# Altium PCB rtl_001_expansion_v1.0.PcbDoc
Units mil, origin at the board's own origin, x right, y up, seen from the top; angles counter-clockwise.
Board outline 1735.38 x 2875.26 mil, 2 copper layers (Top Layer, Bottom Layer); 30 components, 28 nets, 100 pads, 57 vias.
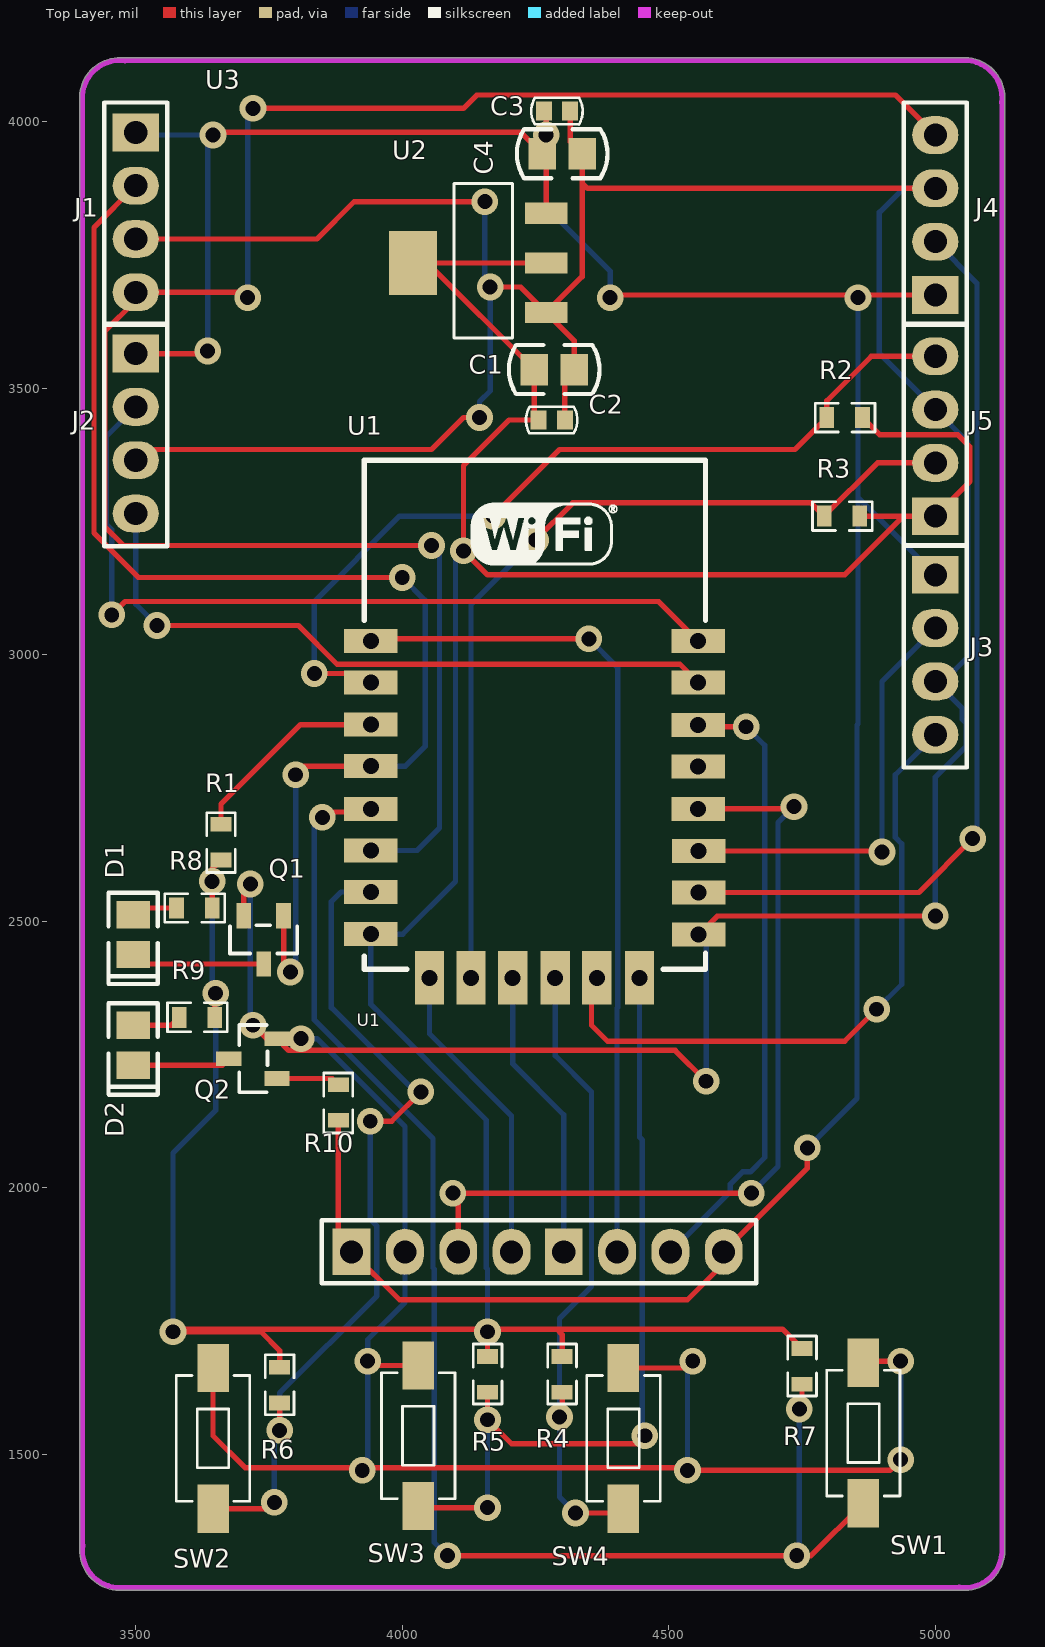
[diagram p0: Top Layer view]
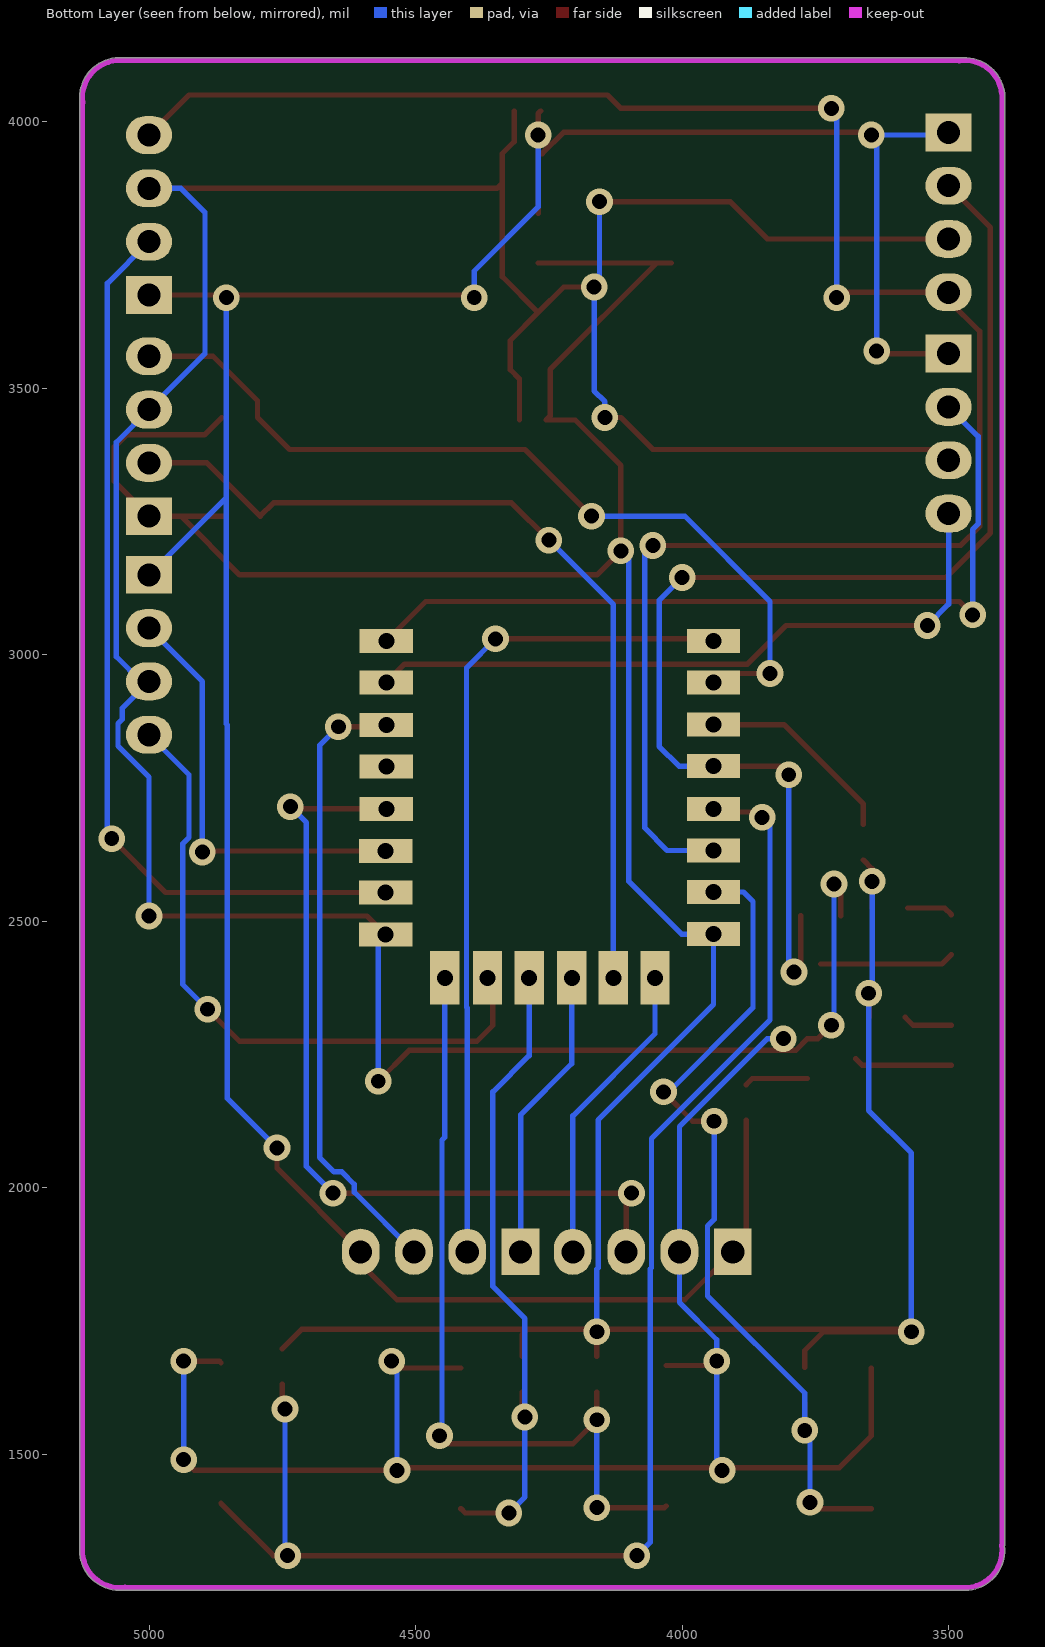
[diagram p1: Bottom Layer view, seen from below]

## Layer stack, top to bottom
Top Solder: solder mask 0.4, Solder Resist, Dk 3.5
Top Layer: signal copper 1.4
Dielectric 1: dielectric 12.6, FR-4, Dk 4.8
Bottom Layer: signal copper 1.4
Bottom Solder: solder mask 0.4, Solder Resist, Dk 3.5

## Board outline
3395.26,1328.28 ccw(c3470,1320) 3475,1244.97 ccw(c3474.67,1249.98) 3475.15,1244.98 5049.82,1244.98 ccw(c5055,1320) 5130.19,1320 ccw(c5055,1320) 5130.03,1325 ccw(c5125.02,1324.67) 5130.02,1325.15 5130.02,4039.82 ccw(c5055,4045) 5130.19,4045 ccw(c5055,4045) 5050,4120.03 ccw(c5050.33,4115.02) 5049.85,4120.02 3480,4120.02 ccw(c3480,4115) 3478.33,4119.73 ccw(c3470,4045) 3394.97,4040 ccw(c3399.98,4040.33) 3394.99,4039.85 3394.99,1329.92 ccw(c3400,1329.92)

## Design rules (kind name [scope] priority, off if disabled: settings)
Clearance [All] p1: gap=7 ignorepadtopadclearanceinfootprint=FALSE
PolygonConnect [All] p1: connectstyle=Relief reliefconductorwidth=10 reliefentries=4 polygonreliefangle="90 Angle" airgapwidth=10
RoutingVias [All] p1: holewidth=28 width=50 viastyle="Through Hole" minholewidth=28 minwidth=50 maxholewidth=28 maxwidth=50
SolderMaskExpansion [All] p1: expansion=4
Width [All] p1: maxlimit=10 minlimit=10 preferedwidth=10
30 further rules are at their usual default settings.

## Components (designator, comment, footprint, x,y, rotation, side; value= is the part's Value field where it differs from the comment)
C1 "10UF" "CAP_SMD[ 0805]" 4285,3535 r90 top
C2 "100nF" "CAP_SMD[ 0603]" 4280,3440 r90 top
C3 "100nF" "CAP_SMD[ 0603]" 4290,4019.5 r90 top
C4 "10UF" "CAP_SMD[ 0805]" 4300,3940 r90 top
D1 "LED_SMD[0805]" LED_SMD[0805] 3495,2475 r90 top
D2 "LED_SMD[0805]" LED_SMD[0805] 3495,2267.6 r90 top
J1 "Header 4" "HEADER 4X1" 3500,3980 r270 top
J2 "Header 4" "HEADER 4X1" 3500,3565 r270 top
J3 "Header 4" "HEADER 4X1" 5000,3150 r270 top
J4 "Header 4" "HEADER 4X1" 5000,3675 r90 top
J5 "Header 4" "HEADER 4X1" 5000,3260 r90 top
Q1 "BC817" SOT-23 3740,2420 r180 top
Q2 "BC817" SOT-23 3674.45,2242.4 r90 top
R1 "10K" "res_smd [0603]" 3660,2648.46 r270 top
R2 "10K" "res_smd [0603]" 4830,3445 r0 top
R3 "10K" "res_smd [0603]" 4825,3260 r0 top
R4 "10K" "res_smd [0603]" 4300,1650 r90 top
R5 "10K" "res_smd [0603]" 4160,1650 r90 top
R6 "10K" "res_smd [0603]" 3770,1630 r90 top
R7 "10K" "res_smd [0603]" 4750,1665 r90 top
R8 "330R" "res_smd [0603]" 3610,2525 r0 top
R9 "330R" "res_smd [0603]" 3615,2320 r0 top
R10 "330R" "res_smd [0603]" 3880,2160 r270 top
SW1 "" 434111043826 4865,1540 r90 top
SW2 "" 434111043826 3645,1530 r90 top
SW3 "" 434111043826 4030,1535 r90 top
SW4 "" 434111043826 4415,1530 r90 top
U1 "RTL_001" RTL-001 4594,2384 r0 top
U2 "AMS1117-3.3" SOT-223 4145,3735 r0 top
U3 "LCD_1_8_module" LCD_1_8_inch_module 3570,1754 r0 top locked

## Footprints (in the part's own frame and the unit in brackets; to place one, negate y for a bottom-side part, rotate by r counter-clockwise, add the part's x,y. Pads: shape width x height; smd on the part's side, far side on the other; paste and mask are expansions set on the pad)
434111043826 [mm] "6.0*3.5mm vertical type, SMD, height 4.3mm, white actuator, 260gf, T&R"
  rect 2.3x1.5 smd: 1(-3.35,0) 2(3.35,0)
  silkscreen extent -3,-1.75 3,1.75, body extent -4,-1.75 4,1.75, height 4.3
"CAP_SMD[ 0603]" [mil]
  rect 35x30 smd: 1(0.5,-25) 2(0.5,24.5)
  silkscreen extent -25,-48 25,48, body extent -15,-33 16,30, height 12
"CAP_SMD[ 0805]" [mm]
  rect 1.5x1.3 smd: 1(0,-0.95) 2(0,0.95)
  silkscreen extent -1.17,-2.16 1.17,2.16
"HEADER 4X1" [mm]
  rect 1.8x2.2 hole 1.1: 1(0,0)
  oval 1.8x2.2 hole 1.1: 2(2.54,0) 3(5.08,0) 4(7.62,0)
  silkscreen extent -1.43,-1.5 9.18,1.5, body extent -1.19,-1.22 8.97,1.32, height 8.38
LCD_1_8_inch_module [mm] "lcd 1.8 inch sst7735"
  rect 1.8x2.2 hole 1.1: 1(8.509,3.2) 5(18.618,3.2)
  oval 1.8x2.2 hole 1.1: 2(11.049,3.2) 3(13.589,3.2) 4(16.129,3.2) 6(21.158,3.2) 7(23.698,3.2) 8(26.238,3.2)
  silkscreen extent 7.08,1.7 27.79,4.7, body extent 7.32,1.98 27.58,4.52, height 2.54
LED_SMD[0805] [mm]
  rect 1.3x1.6 smd: 1(0.95,0) 2(-0.95,0)
  silkscreen extent -2.36,-1.18 2,1.18
"res_smd [0603]" [mm]
  rect 0.7x1 smd: 1(-0.85,0) 2(0.85,0)
  silkscreen extent -1.41,-0.69 1.45,0.69, body extent -0.8,-0.43 0.8,0.43, height 0.48
RTL-001 [mil] "wifi module"
  rect 100x45 hole 30: 1(-653,642) 2(-653,564) 3(-653,485) 4(-653,407) 5(-653,327) 6(-653,249) 7(-653,171) 8(-653,92) 15(-38,91) 16(-38,170) 17(-38,248) 18(-39,327) 19(-39,406) 20(-39,484) 21(-39,564) 22(-39,642)
  rect 55x100 hole 30: 9(-543,10) 10(-465,10) 11(-387,10) 12(-307,10) 13(-229,10) 14(-149,10)
  silkscreen extent -665,26 -25,981, body extent -658,31 -28,976
SOT-23 [mm]
  rect 0.7x1.2 smd: 1(-0.95,-2.3) 2(0.95,-2.3) 3(0,0)
  silkscreen extent -1.6,-1.85 1.6,-0.5, body extent -1.46,-2.41 1.46,-0.07, height 1
SOT-223 [mil]
  rect 80x40 smd: 1(125,-93) 2(125,0) 3(125,93)
  rect 90x120 smd: 4(-125,0)
  silkscreen extent -48,-141 62,149, body extent -131,-128 143,128, height 63

## Part data
C1 C4: library part "CAP_smd [0805]", "capacitor", Package=[0805], Package Type=smd, part number=Capacitor, brief description="ceramic capacitor", Device Type=CAPACITOR
C2 C3: library part "CAP_smd [0603]", "capacitor", Package=[0603], Package Type=smd, part number=Capacitor, brief description="ceramic capacitor", Device Type=CAPACITOR
D1 D2: "Typical (?COLOR?) LED", Package=[0805], Package Type=smd, brief description="Typical (?COLOR?) LED", Device Type=MISCELLANEOUS, ???????="?? ?????????", ????=900-620
J1 J2 J3 J4 J5: "Header, 4-Pin", Package="Header, 4-Pin(2.54mm)", Package Type="through hole", brief description="Header, 4-Pin", Device Type=CONNECTOR
Q1 Q2: "SMD;TRANSISTOR;BC817;SOT-23;NPN;(General-purpose)", ?????=SMD;TRANSISTOR;BC817;SOT-23;NPN;(General-purpose), ???????="???? ?????????-?? ?????????-???? ?????????", ????="420-1.500  1.000??-1", ????=SOT-23
R1 R2 R3 R4 R5 R6 R7 R8 R9 R10: library part "Res_smd [0603]", "Resistor", Package=[0603], Package Type=smd, Device Type=RESISTOR, part number=Resistor, Revision="July-2002: Re-released for DXP Platform."
SW1 SW2 SW3 SW4: library part "WE-Tact Switches WS-TASV 434111043826", "WS-TASV SMD Tact Switch 6.0X3.5 mm", manufacturer="Würth Elektronik eiSos GmbH & Co.KG", partNo=434111043826, ComponentLink1 Description=Manufacturer, ComponentLink1URL=http://www.we-online.com, ComponentLink2 Description=Datasheet, ComponentLink2URL=http://katalog.we-online.de/em/datasheet/434111043826.pdf, Creat by="Karrer Zheng", Creat Date="5 March February 2014", NoPins=02
U2: "Adjustable/Fixed Low Dropout Linear Regulator", ?????="Adjustable/Fixed Low Dropout Linear Regulator", ???????="???? ?????????", ????=1.570, ????=SOT-223

## Via types
v1: diameter 50, hole 28, Top Layer to Bottom Layer, 57 vias

## Nets (pads, with @x,y where several pads share a name; then routed paths per layer and width w, separated by ;. In a path a pad name is that pad's centre, name@x,y a point inside that pad or via, vN(x,y) a via of type N, cw(c..) or ccw(c..) an arc to the next point about the centre after c; other vN are vias at no path point)
D1: R4.1 SW4.1 U1.12 | length 1211.4
  Top Layer w10: v1(4295,1570) 4300,1575 R4.1 ; v1(4325,1390) 4406.89,1390 SW4.1
  Bottom Layer w10: U1.12 4287,2248 4355,2180 4355,1815 4295,1755 v1(4295,1570) 4295,1420 v1(4325,1390)
D2: R5.1 SW3.1 U1.14 | length 1530.8
  Top Layer w10: SW3.1 4033.11,1400 v1(4160,1400) ; R5.1 v1(4160,1565) 4205,1520 4440,1520 v1(4455,1535)
  Bottom Layer w10: v1(4160,1400) v1(4160,1565) ; U1.14 4445,2095 4450.43,2089.57 4450.43,1539.57 v1(4455,1535)
D3: U1.9 U3.4 | length 577.8
  Bottom Layer w10: U1.9 4051,2289 4205,2135 U3.4
D5: U1.11 U3.5 | length 553.8
  Bottom Layer w10: U1.11 4207,2233 4303,2137 U3.5
D15: R7.1 SW1.1 U1.5 | length 2738.7
  Top Layer w10: v1(3850,2695) 3860,2705 3935,2705 U1.5 ; v1(4085,1310) v1(4740,1310) 4766.89,1310 SW1.1 ; v1(4745,1585) 4750,1590 R7.1
  Bottom Layer w10: v1(3850,2695) 3835,2680 3835,2315 4057.57,2092.43 4057.57,1850.05 4060,1847.61 4060,1335 v1(4085,1310) ; v1(4740,1310) 4745,1315 v1(4745,1585)
D16: R6.1 SW2.1 U1.7 | length 1603
  Top Layer w10: SW2.1 3748.11,1398.11 v1(3760,1410) ; v1(3770,1545) R6.1 ; v1(3940,2125) 3980,2125 v1(4035,2180)
  Bottom Layer w10: v1(3760,1410) 3760,1535 v1(3770,1545) 3770,1615 3952.43,1797.43 3952.43,1928.28 3940,1940.71 v1(3940,2125) ; U1.7 3885,2555 3867,2537 3867,2338 4025,2180 v1(4035,2180)
ENABLE: R1.1 U1.3 | length 380.8
  Top Layer w10: R1.1 3660,2720 3809,2869 U1.3
GND: C1.1 C2.1 C3.1 C4.1 J1.3 J2.3 J3.3 J4.3 J5.3 Q1.2 Q2.2 SW1.2 SW2.2 SW3.2 SW4.2 U1.15 U2.1 U3.2 | length 9872
  Top Layer w10: J2.3 3520,3385 4055,3385 4115,3445 v1(4145,3445) ; J1.3 3840,3780 3910,3850 v1(4155,3850) ; SW2.2 3645,1535 3705,1475 4530,1475 v1(4535,1470) 4915,1470 v1(4935,1490) ; Q1.2 3702.6,2557.6 v1(3715,2570) ; v1(3720,2305) 3745.2,2279.8 Q2.2 3786.8,2258 4512,2258 v1(4570,2200) ; v1(3935,1675) 3943.11,1666.89 SW3.2 ; v1(4165,3690) 4222,3690 U2.1 ; C2.1 4305,3517.6 C1.1 4322.4,3589.6 U2.1 ; C3.1 4315,3962.4 C4.1 4337.4,3885 ; SW4.2 4531.89,1661.89 v1(4545,1675) ; U1.15 4591,2510 v1(5000,2510) ; SW1.2 4868.11,1675 v1(4935,1675) ; J4.3 4347.4,3875 4337.4,3885 ; U2.1 4337.4,3709.4 4337.4,3885
  Bottom Layer w10: v1(3715,2570) 3715,2310 v1(3720,2305) ; v1(3810,2280) 3840,2280 4005,2115 U3.2 4005,1785 3935,1715 v1(3935,1675) 3935,1480 v1(3925,1470) ; v1(4145,3445) 4145,3475 4165,3495 v1(4165,3690) 4160,3690 4155,3695 v1(4155,3850) ; v1(4535,1470) 4535,1665 v1(4545,1675) ; U1.15 4570,2461 v1(4570,2200) ; v1(4935,1490) v1(4935,1675) ; v1(5000,2510) 5000,2770.8 5058.31,2829.11 5058.31,2870.89 5050,2879.2 5050,2900 J3.3 5015,2950 5061.31,2996.31 5061.31,3398.69 J5.3 4895,3565 4895,3830 4940,3875 J4.3
I2C1_SCL: J5.4 R2.1 U1.2 | length 1622.1
  Top Layer w10: v1(3835,2965) 3924,2965 U1.2 ; v1(4170,3260) 4295,3385 4736.54,3385 R2.1 4796.54,3476.54 4880,3560 J5.4
  Bottom Layer w10: v1(3835,2965) 3835,3100 3995,3260 v1(4170,3260)
I2C1_SDA: J5.2 R3.1 U1.10 | length 1701.9
  Top Layer w10: v1(4250,3215) 4320,3285 4766.54,3285 R3.1 4891.54,3360 J5.2
  Bottom Layer w10: U1.10 4129,3094 v1(4250,3215)
LOG_RX: J2.4 U1.21 | length 1286.3
  Top Layer w10: v1(3540,3055) 3805,3055 3878,2982 3885.53,2982 3886.03,2982.5 4520.5,2982.5 U1.21
  Bottom Layer w10: J2.4 3500,3095 v1(3540,3055)
LOG_TX: J2.2 U1.22 | length 1558.2
  Top Layer w10: v1(3455,3075) 3480,3100 4481,3100 U1.22
  Bottom Layer w10: v1(3455,3075) 3455,3235.05 3444.69,3245.35 3444.69,3409.69 J2.2
NetD1_1: D1.1 R8.1 | length 86.8
  Top Layer w10: D1.1 3507.6,2525 R8.1
NetD1_2: D1.2 Q1.3 | length 252.3
  Top Layer w10: D1.2 3512.6,2420 Q1.3
NetD2_1: D2.1 R9.1 | length 92.7
  Top Layer w10: D2.1 3566.54,2305 R9.1
NetD2_2: D2.2 Q2.3 | length 184.5
  Top Layer w10: D2.2 3662.24,2230.2 Q2.3
NetQ2_1: Q2.1 R10.1 | length 119.8
  Top Layer w10: Q2.1 3868.46,2205 R10.1
PWM0: U1.18 U3.3 | length 1613.9
  Top Layer w10: U3.3 4105,1980 v1(4095,1990) v1(4655,1990) ; U1.18 4731,2711 v1(4735,2715)
  Bottom Layer w10: v1(4655,1990) 4705,2040 4705,2685 v1(4735,2715)
SPI0_CLK: U1.20 U3.7 | length 1172.6
  Top Layer w10: U1.20 4558,2865 v1(4645,2865)
  Bottom Layer w10: U3.7 4615,1992 4615,2006.57 4638.43,2030 4653,2030 4680,2057 4680,2830 v1(4645,2865)
SPI0_MISO: U1.19
SPI0_MOSI: U1.1 U3.6 | length 1583.9
  Top Layer w10: U1.1 3945,3030 v1(4350,3030)
  Bottom Layer w10: v1(4350,3030) 4404.5,2975.5 4404.5,2339.03 4403,2337.53 U3.6
SWCLK: J1.2 Q1.1 U1.4 | length 2381.6
  Top Layer w10: J1.2 3421.69,3801.69 3421.69,3228.31 3505,3145 v1(4000,3145) ; Q1.1 3777.4,2417.6 v1(3790,2405) ; v1(3800,2775) 3816,2791 U1.4
  Bottom Layer w10: v1(3790,2405) 3800,2415 v1(3800,2775) ; U1.4 4006,2791 4043,2828 4043,3102 v1(4000,3145)
SWDIO: J1.4 J4.4 U1.6 | length 3668.8
  Top Layer w10: v1(3710,3670) 3700,3680 J1.4 3500,3664.95 3441.69,3606.65 3441.69,3240.8 3477.5,3205 v1(4055,3205) ; v1(3720,4025) 4115,4025 4140,4050 4925,4050 J4.4
  Bottom Layer w10: v1(3710,3670) 3710,4015 v1(3720,4025) ; U1.6 4028,2633 4070,2675 4070,3190 v1(4055,3205)
U0_TX: J4.2 U1.16 | length 1711.7
  Top Layer w10: U1.16 4969,2554 v1(5070,2655)
  Bottom Layer w10: J4.2 5078.31,3696.69 5078.31,2663.31 v1(5070,2655)
U2_RX: J3.4 U1.13 | length 1235.9
  Top Layer w10: U1.13 4355,2384 4355,2305 4385,2275 4830,2275 v1(4890,2335)
  Bottom Layer w10: v1(4890,2335) 4937,2382 4937,2645.33 4925,2657.33 4925,2775 J3.4
U2_TX: J3.2 U1.17 | length 806.2
  Top Layer w10: U1.17 4898,2632 v1(4900,2630)
  Bottom Layer w10: v1(4900,2630) 4900,2950 J3.2
VCC: C3.2 C4.2 J1.1 J2.1 J3.1 J4.1 R10.2 U2.3 U3.1 U3.8 | length 5629.9
  Top Layer w10: J2.1 3630,3565 v1(3635,3570) ; v1@3645,3980 4222.6,3980 C4.2 ; R10.2 3880,1905 U3.1 3995,1790 4535,1790 4590,1845 4590,1867 U3.8 4760,2037 v1(4760,2075) ; C3.2 4270,4015.5 v1(4270,3975) U2.3 ; v1(4390,3670) 4395,3675 J4.1
  Bottom Layer w10: J1.1 3505,3975 v1(3645,3975) 3635,3965 v1(3635,3570) ; v1(4270,3975) 4270,3840 4390,3720 v1(4390,3670) ; v1(4760,2075) 4853,2168 4853,2868 4855,2870 4855,3295 ; v1(4855,3670) 4855,3295 ; J3.1 4855,3295
VCC_3V3: C1.2 C2.2 J5.1 R1.2 R2.2 R3.2 R4.2 R5.2 R6.2 R7.2 R8.2 R9.2 U1.8 U2.2 U2.4 | length 6615.2
  Top Layer w10: R8.2 v1(3643.46,2575) 3643.46,2598.46 R1.2 ; R9.2 3648.46,2363.46 v1(3650,2365) ; R6.2 3770,1695 3735,1730 v1(3570,1730) 3575,1735 v1@4160,1735 ; U2.4 U2.4@4047.6,3735 ; R5.2 v1(4160,1730) v1@4160,1735 ; U2.2 U2.4@4047.6,3735 ; R4.2 4300,1725 4290,1735 ; R7.2 4713.46,1735 4290,1735 ; R3.2 4940,3260 ; R2.2 4895.9,3412.57 5042.43,3412.57 5065,3390 5065,3325 J5.1 4940,3260 ; U2.4@4047.6,3735 C1.2 4247.6,3448.4 C2.2 4200.5,3440.5 4115,3355 v1(4115,3195) 4160,3150 4830,3150 4940,3260 ; v1@4160,1735 4290,1735
  Bottom Layer w10: v1(3570,1730) 3570,2065 3650,2145 v1(3650,2365) 3643.46,2371.54 v1(3643.46,2575) ; v1(4115,3195) 4100,3180 4100,2575 4001,2476 U1.8 3941,2344 4157.57,2127.43 4157.57,1850.05 4160,1847.61 v1(4160,1730)

## Keep-outs
Keep-Out Layer:
  lines w10: 3400,1329.92 3400,4040.33 cw(c3470,4045) 3479.92,4114.47 ; 3400.53,1329.92 ccw(c3470,1320) 3474.67,1249.98 ; 3470,1250 5055,1250 ; 3480,4115 5050,4115 ; 5045.08,1250.53 ccw(c5055,1320) 5125.02,1324.67 ; 5050.33,4115.02 cw(c5055,4045) 5124.47,4035.08 ; 5125,1320 5125,4040

## Text inside footprints (layer, text, board x,y; h text height)
U1: Mechanical 13 "ANTENNA AREA" at 3941.04,3340.59 h10; Mechanical 13 "CUTOUT POLYGON" at 3941.04,3320.59 h10